# Altium PCB uln2003_PCB.PcbDoc
Units mm, origin at the board's own origin, x right, y up, seen from the top; angles counter-clockwise.
Board outline 35.03 x 23.24 mm, 2 copper layers (Top Layer, Bottom Layer); 20 components, 24 nets, 72 pads, 21 vias.
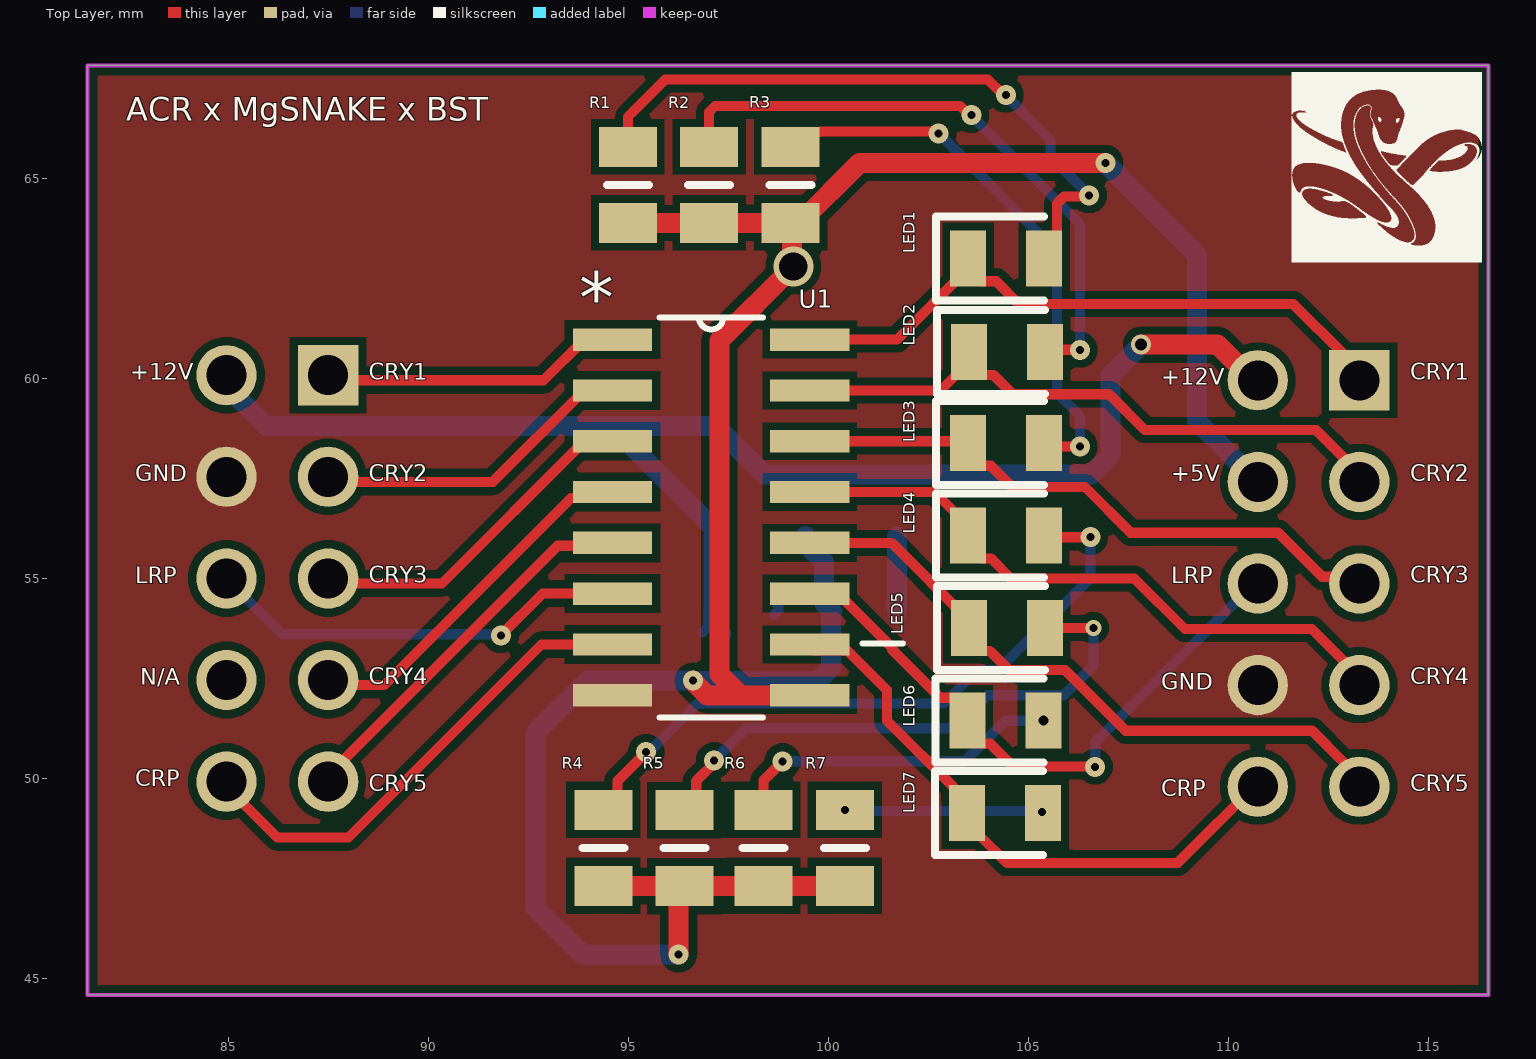
[diagram p0: Top Layer view]
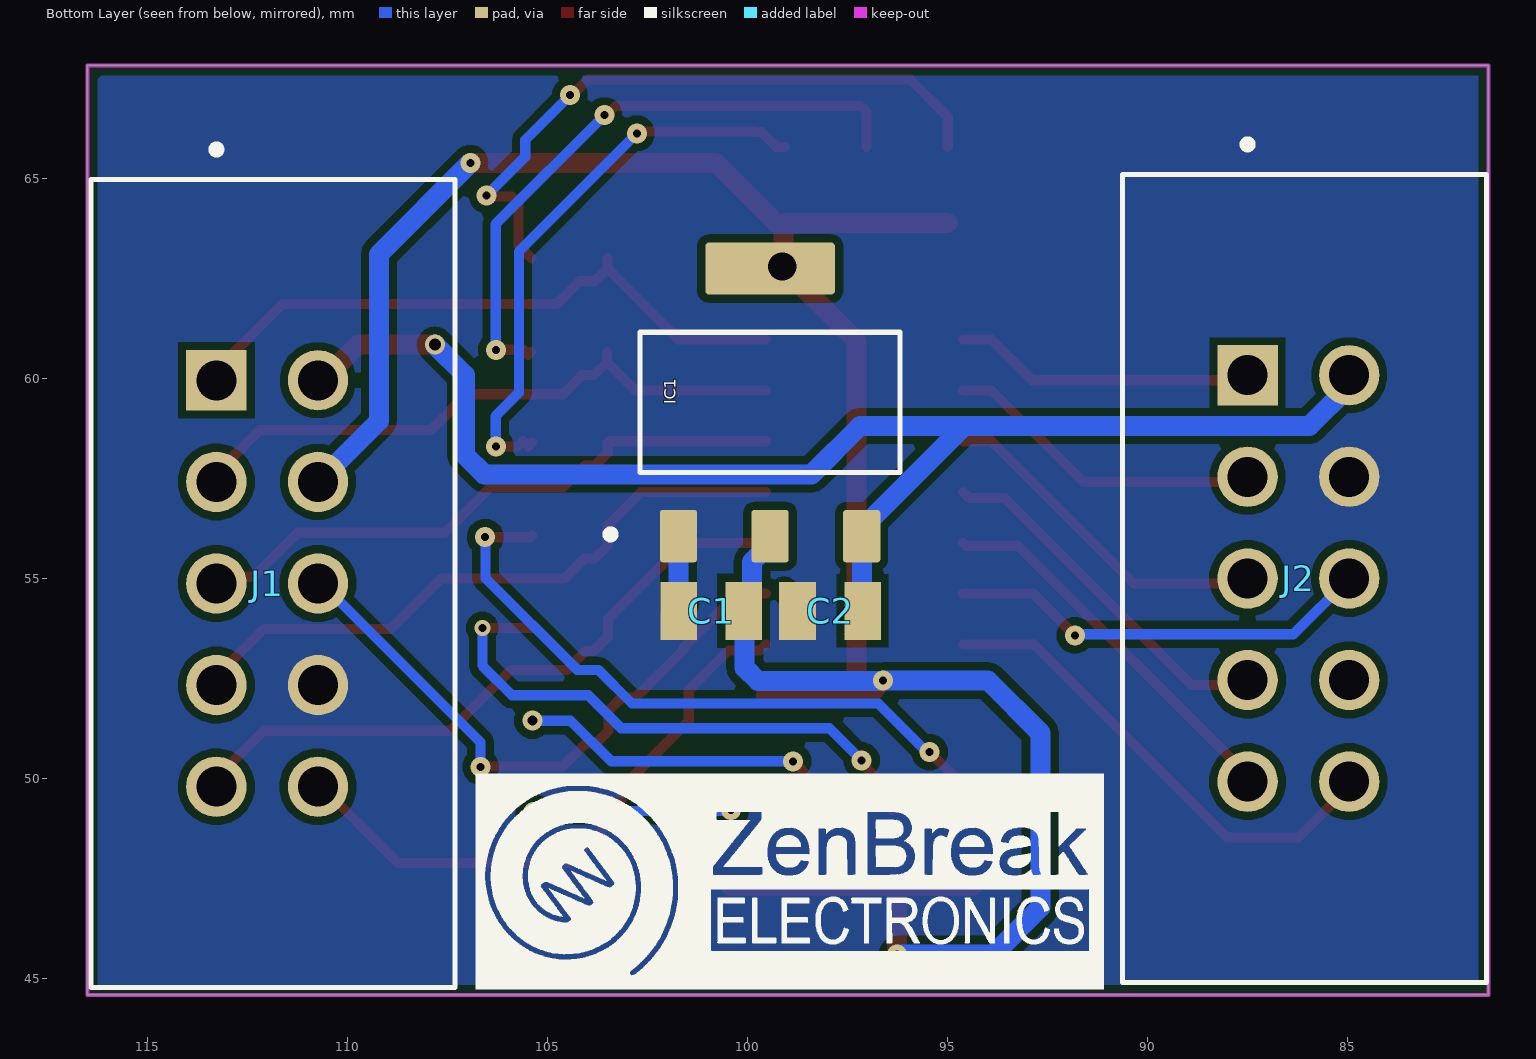
[diagram p1: Bottom Layer view, seen from below]
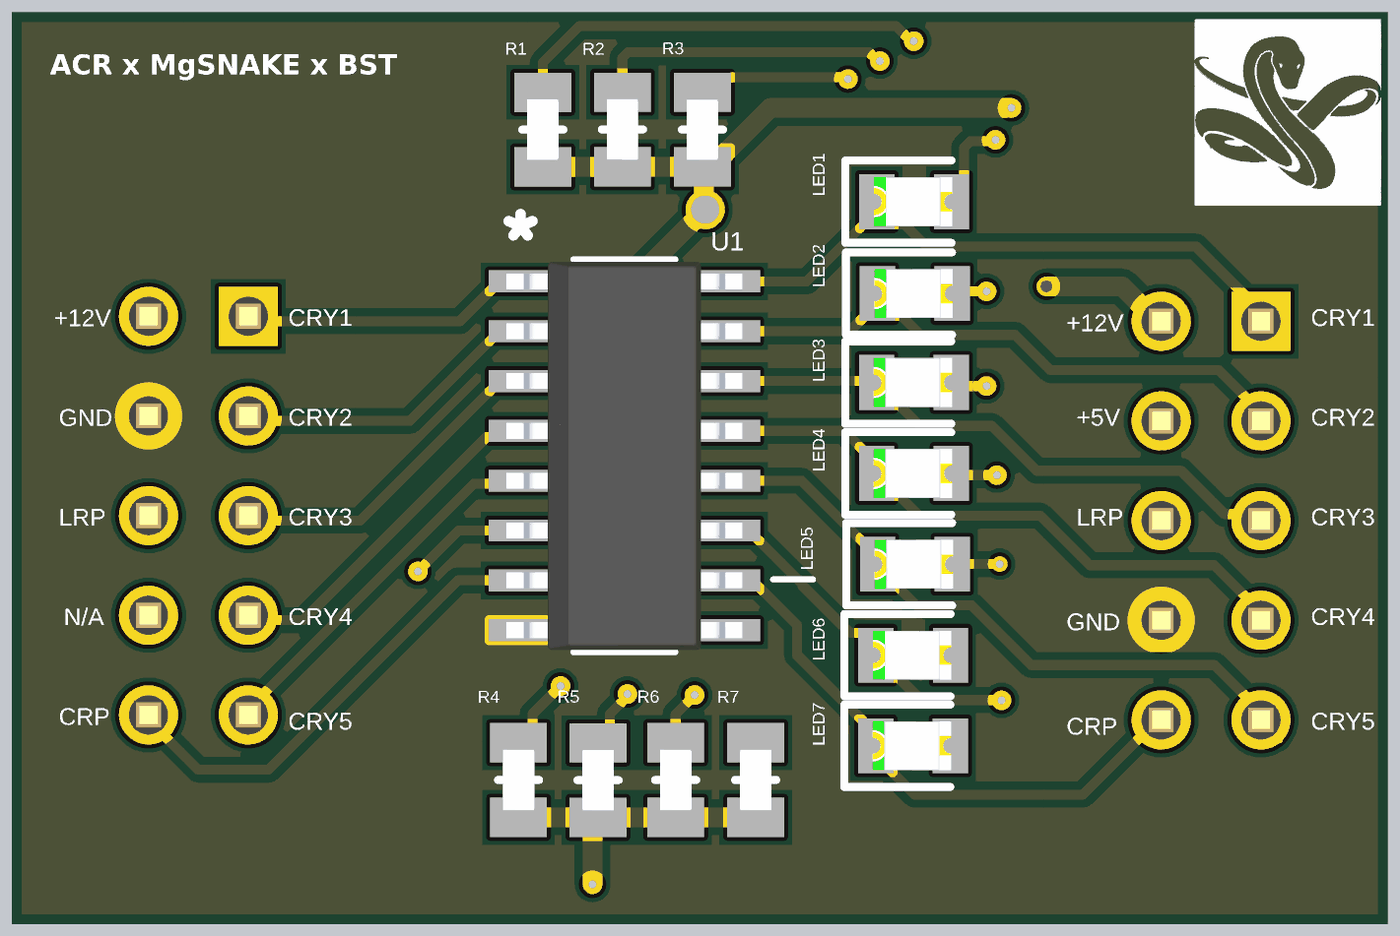
[diagram p2: 3D render of the assembled board from above, using the file's embedded part models]
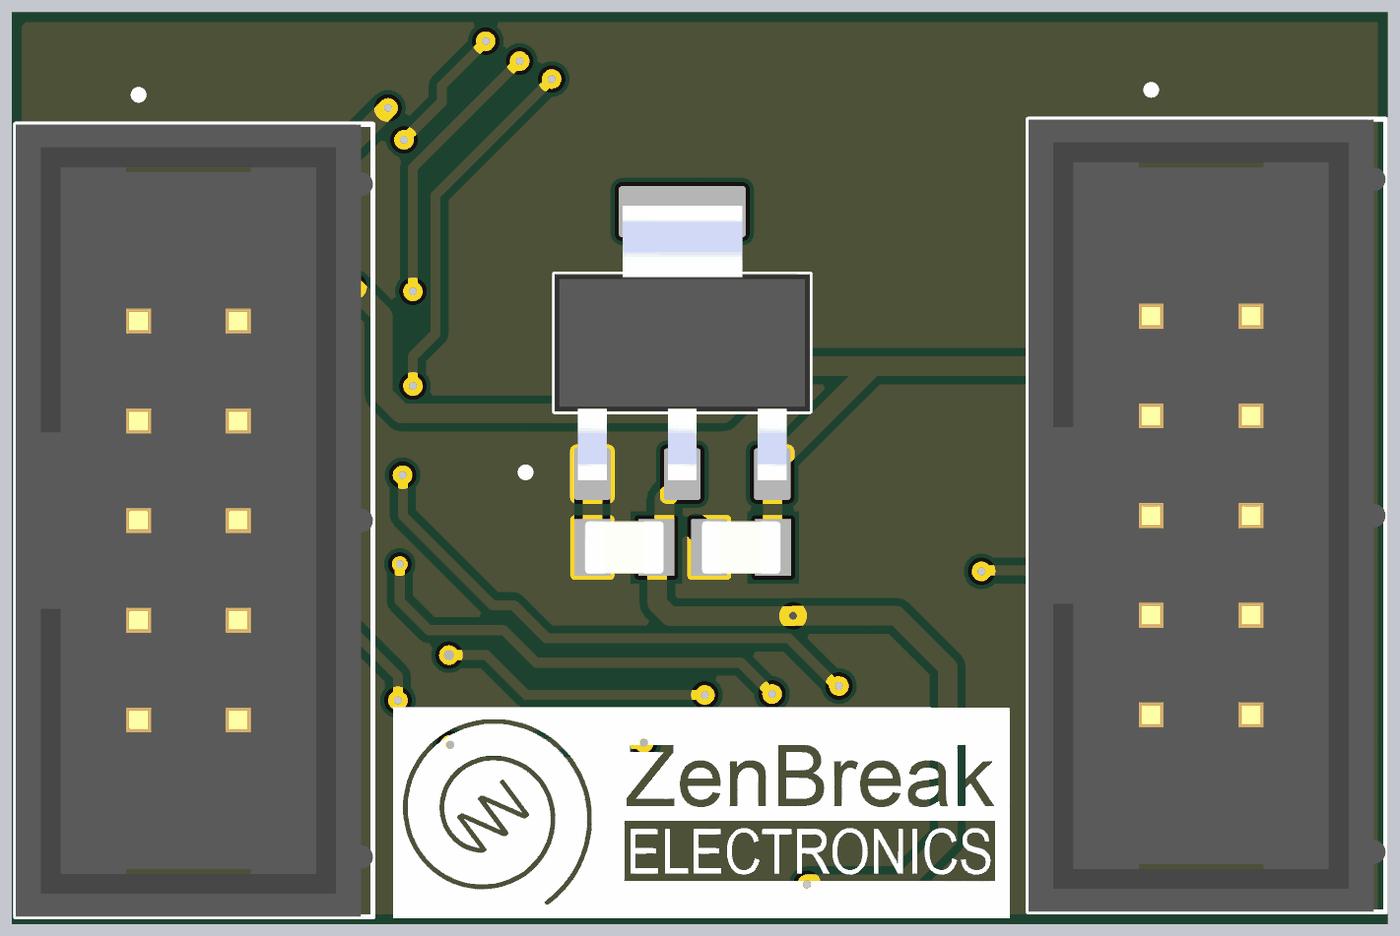
[diagram p3: 3D render of the assembled board from below, using the file's embedded part models]

## Layer stack, top to bottom
Top Solder: solder mask 0.0102, Solder Resist, Dk 3.5
Top Layer: signal copper 0.0356
Dielectric 1: dielectric 0.32, FR-4, Dk 4.8
Bottom Layer: signal copper 0.0356
Bottom Solder: solder mask 0.0102, Solder Resist, Dk 3.5

## Board outline
116.51,67.818 81.483,67.818 81.483,44.577 116.51,44.577

## Design rules (kind name [scope] priority, off if disabled: settings)
Clearance [All] p1: gap=0.2 ignorepadtopadclearanceinfootprint=TRUE except(0.1: Arc-Arc Arc-Track Track-Track; 0.127: Arc-SMDPad Track-SMDPad SMDPad-SMDPad SMDPad-Via)
HoleToHoleClearance [All] p1: gap=0.2 allowstackedmicrovias=TRUE
MinimumSolderMaskSliver [All] p1: minsoldermaskwidth=0.2
PolygonConnect [All] p1: connectstyle=Direct reliefconductorwidth=0.254 reliefentries=4 polygonreliefangle="90 Angle" airgapwidth=0.254
RoomDefinition uln2003_Shematics [InComponentClass('uln2003_Shematics')] p1: confinementstyle=ConfineIn formatcopy=TRUE lockcomponents=FALSE outline 0,0 50.8,0 50.8,25.4 0,25.4
RoutingVias [All] p1: holewidth=0.711 width=1.27 viastyle="Through Hole" minholewidth=0.01 minwidth=0.01 maxholewidth=1 maxwidth=1
SilkToSilkClearance [All] p1: silktosilkclearance=0.1
SilkToSolderMaskClearance [IsPad] p1: minsilkscreentomaskgap=0.01 clearancetoexposedcopper=TRUE
SolderMaskExpansion [All] p1: expansion=0.102 istentingtop=FALSE
Width [All] p1: maxlimit=1 minlimit=0.2 preferedwidth=0.254 minimp=50.000000 maximp=50.000000 favimp=50.000000
26 further rules are at their usual default settings.

## Components (designator, comment, footprint, x,y, rotation, side; value= is the part's Value field where it differs from the comment)
C1 "22uF" CAPC2013X140N 100.914,54.178 r0 bottom
C2 "22uF" CAPC2013X140N 97.942,54.178 r0 bottom
IC1 "AMS1117-5.0" SOT229P700X180-4N 99.441,59.393 r180 bottom
J1 "SBH11-PBPC-D05-ST-BK" SULLINS_SBH11-PBPC-D05-ST-BK 112.014,54.864 r270 bottom locked
J2 "SBH11-PBPC-D05-ST-BK" SULLINS_SBH11-PBPC-D05-ST-BK 86.233,54.991 r270 bottom locked
LED1 "150080BS75000" LEDC2012X80N 104.455,62.992 r0 top
LED2 "150080BS75000" LEDC2012X80N 104.469,60.648 r0 top
LED3 "150080BS75000" LEDC2012X80N 104.448,58.382 r0 top
LED4 "150080BS75000" LEDC2012X80N 104.449,56.065 r0 top
LED5 "150080BS75000" LEDC2012X80N 104.473,53.752 r0 top
LED6 "150080BS75000" LEDC2012X80N 104.432,51.434 r0 top
LED7 "150080BS75000" LEDC2012X80N 104.426,49.125 r0 top locked
R1 "220" RESC2012X65N 95,64.827 r270 top
R2 "220" RESC2012X65N 97.028,64.831 r270 top
R3 "220" RESC2012X65N 99.065,64.829 r270 top
R4 "220" RESC2012X65N 94.383,48.253 r270 top
R5 "220" RESC2012X65N 96.408,48.248 r270 top
R6 "220" RESC2012X65N 98.383,48.253 r270 top
R7 "220" RESC2012X65N 100.42,48.253 r270 top
U1 "ULN2003" SOIC127P600X175-16N 97.079,56.515 r0 top locked

## Footprints (in the part's own frame and the unit in brackets; to place one, negate y for a bottom-side part, rotate by r counter-clockwise, add the part's x,y. Pads: shape width x height; smd on the part's side, far side on the other; paste and mask are expansions set on the pad)
CAPC2013X140N [mil]
  rect 36x57 smd: 1(-32,0) 2(32,0)
  body extent -40,-27 40,27, height 49
LEDC2012X80N [mm]
  rect 0.9x1.4 smd: 1(-0.95,0) 2(0.95,0)
  silkscreen extent -1.75,-1.05 0.95,1.05, body extent -1.03,-0.63 0.97,0.63, height 0.7
RESC2012X65N [mm]
  rect 1x1.45 smd: 1(-0.95,0) 2(0.95,0)
  silkscreen extent 0,-0.53 0,0.53, body extent -0.77,-0.4 0.77,0.4, height 0.46
SOIC127P600X175-16N [mil]
  rect 78x22 smd: 1(-97,175) 2(-97,125) 3(-97,75) 4(-97,25) 5(-97,-25) 6(-97,-75) 7(-97,-125) 8(-97,-175) 9(97,-175) 10(97,-125) 11(97,-75) 12(97,-25) 13(97,25) 14(97,75) 15(97,125) 16(97,175)
  silkscreen extent -51,-197 189,197, body extent -118,-195 118,195, height 69
SOT229P700X180-4N [mm]
  rrect15% 0.93x1.31 smd: 1(-2.29,-3.345) 2(0,-3.345) 3(2.29,-3.345)
  rrect15% 3.24x1.31 smd: 4(0,3.345)
  silkscreen extent -4.09,-3.4 3.25,1.75, body extent -3.25,-3.5 3.25,3.5, height 1.8
SULLINS_SBH11-PBPC-D05-ST-BK [mm]
  rect 1.508x1.508 / inner round 1.508 / far side rect 1.508x1.508 hole 1: 1(-5.08,-1.27)
  round 1.508 hole 1: 2(-5.08,1.27) 3(-2.54,-1.27) 4(-2.54,1.27) 5(0,-1.27) 6(0,1.27) 7(2.54,-1.27) 8(2.54,1.27) 9(5.08,-1.27) 10(5.08,1.27)
  silkscreen extent -10.95,-4.4 10.1,4.7, body extent -10.1,-4.39 10.1,4.7, height 9.09

## Part data
C1 C2: library part 08053C474JAT2A, "Capacitor", Manufacturer_Name="Kyocera AVX", Mouser Part Number=581-08053C474JAT2A, Manufacturer_Part_Number=08053C474JAT2A, Mouser Price/Stock=https://www.mouser.co.uk/ProductDetail/KYOCERA-AVX/08053C474JAT2A?qs=bb%252B1MDm7h6L8wnHciIrwGg%3D%3D
IC1: "Integrated Circuit", Manufacturer_Name=Shikues, Datasheet Link=https://datasheet.lcsc.com/szlcsc/SK-AMS1117-5-0_C165483.pdf, Height=1.8mm, Manufacturer_Part_Number=AMS1117-5.0
J1 J2: "10 Position Total Dual Row 2.54 mm Pitch Straight Male Shrouded Box Header", Package=None, Check_prices=https://www.snapeda.com/parts/SBH11-PBPC-D05-ST-BK/Sullins+Connector+Solutions/view-part/?ref=eda, MF="Sullins Connector", MP=SBH11-PBPC-D05-ST-BK, SnapEDA_Link=https://www.snapeda.com/parts/SBH11-PBPC-D05-ST-BK/Sullins+Connector+Solutions/view-part/?ref=snap
LED1 LED2 LED3 LED4 LED5 LED6 LED7: "LED", Manufacturer_Name="Wurth Elektronik", Mouser Part Number=710-150080BS75000, Datasheet Link=https://katalog.we-online.com/led/datasheet/150080BS75000.pdf, Height=0.8mm, Manufacturer_Part_Number=150080BS75000, Mouser Price/Stock=https://www.mouser.co.uk/ProductDetail/Wurth-Elektronik/150080BS75000?qs=2kOmHSv6VfT2tBo3UPVqAQ%3D%3D
R1 R2 R3 R4 R5 R6 R7: library part CPF0805B102RE1, "Resistor", Manufacturer_Name="TE Connectivity", Datasheet Link=http://docs-europe.electrocomponents.com/webdocs/13d1/0900766b813d116f.pdf, Height=0.65mm, Manufacturer_Part_Number=CPF0805B102RE1
U1: "Bipolar (BJT) Transistor Array 7 NPN Darlington 50V 500mA - - Surface Mount 16-SOIC", Package="SOIC-16 National Semiconductor", Availability="Not in stock", Check_prices=https://www.snapeda.com/parts/ULN2003/Texas+Instruments/view-part/?ref=eda, MF="Texas Instruments", MP=ULN2003, Price=None, SnapEDA_Link=https://www.snapeda.com/parts/ULN2003/Texas+Instruments/view-part/?ref=snap

## Via types
v1: diameter 0.5, hole 0.2, Top Layer to Bottom Layer, 17 vias
v2: diameter 0.5, hole 0.25, Top Layer to Bottom Layer, 1 vias
v3: diameter 0.4, hole 0.2, Top Layer to Bottom Layer, 1 vias
v4: diameter 1, hole 0.711, Top Layer to Bottom Layer, 1 vias
v5: diameter 0.5, hole 0.3, Top Layer to Bottom Layer, 1 vias

## Nets (pads, with @x,y where several pads share a name; then routed paths per layer and width w, separated by ;. In a path a pad name is that pad's centre, name@x,y a point inside that pad or via, vN(x,y) a via of type N, cw(c..) or ccw(c..) an arc to the next point about the centre after c; other vN are vias at no path point)
+5V: C1.1 IC1.2 IC1.4 J1.4 R1.2 R2.2 R3.2 R4.2 R5.2 R6.2 R7.2 U1.9 | length 66
  Top Layer w0.254: R5.2@96.266,46.932 96.52,47.186 R5.2 R5.2@96.403,47.303 ; R2.2@97.024,63.877 R2.2 ; R6.2@98.378,47.298 R6.2 ; R3.2@99.063,63.881 R3.2 R3.2@99.29,63.879
  Top Layer w0.5: R4.2 R5.2@96.403,47.303 ; R1.2 R2.2@97.024,63.877 ; v1(96.266,45.593) R5.2@96.266,46.932 ; R5.2 R6.2@98.378,47.298 ; v1(96.621,52.438) 96.621,52.427 96.977,52.07 97.812,52.07 ; R2.2 R3.2@99.063,63.881 ; R6.2 R7.2 ; R3.2 99.101,63.843 99.101,62.824 v4(99.136,62.789) 97.282,60.935 97.282,52.6 97.812,52.07 ; R3.2@99.29,63.879 100.791,65.38 v1(106.934,65.38) ; U1.9 97.812,52.07
  Bottom Layer w0.5: v1(96.266,45.593) 93.853,45.593 92.685,46.761 92.685,51.13 93.992,52.438 v1(96.621,52.438) ; v1@96.622,52.426 99.746,52.426 100.076,52.756 100.076,54.153 C1.1 99.894,54.385 99.894,55.405 99.441,55.858 IC1.2 ; v1(106.934,65.38) 109.22,63.094 109.22,58.928 J1.4
+12: C2.1 IC1.3 J1.2 J2.2 | length 36.8
  Top Layer w0.254: J2.2@84.963,59.944 J2.2 ; J1.2@110.631,59.944 J1.2
  Top Layer w0.5: v5(107.823,60.833) 109.742,60.833 J1.2@110.631,59.944
  Bottom Layer w0.254: C2.1@96.858,53.64 C2.1@97.13,53.911
  Bottom Layer w0.3: C2.1@97.13,53.911 C2.1@97.437,53.604
  Bottom Layer w0.5: J2.2 84.963,59.798 85.96,58.801 94.588,58.801 ; C2.1@97.13,53.911 C2.1 97.14,54.189 97.14,56.037 IC1.3 97.151,56.238 94.588,58.801 ; v5(107.823,60.833) 107.068,60.078 107.068,58.072 106.589,57.593 98.403,57.593 97.195,58.801 94.588,58.801
GND: C1.2 C2.2 IC1.1 J1.8 J2.4 U1.8 | length 2.9
  Bottom Layer w0.254: C2.2@98.657,54.08 C2.2 98.755,54.381 C2.2@99.085,54.711 ; C1.2@101.549,54.356 C1.2 ; IC1.1@101.727,56.044 IC1.1
  Bottom Layer w0.5: C1.2 101.729,54.18 101.729,56.042 IC1.1@101.727,56.044
IN1: J2.1 U1.1 | length 7.5
  Top Layer w0.254: J2.1@87.503,59.944 92.888,59.944 93.904,60.96 U1.1
IN2: J2.3 U1.2 | length 8.1
  Top Layer w0.254: J2.3@87.503,57.404 91.618,57.404 93.904,59.69 U1.2
IN3: J2.5 U1.3 | length 8.6
  Top Layer w0.254: J2.5@87.503,54.864 90.348,54.864 93.904,58.42 U1.3
IN4: J2.7 U1.4 | length 9.1
  Top Layer w0.254: J2.7@87.503,52.324 88.9,52.324 93.574,56.998 94.463,56.998 U1.4
IN5: J2.9 U1.5 | length 9.7
  Top Layer w0.254: J2.9 87.503,50.067 93.243,55.807 94.542,55.807 U1.5
IN6: J2.6 U1.6 | length 10.7
  Top Layer w0.254: v1(91.821,53.569) 92.862,54.61 U1.6
  Bottom Layer w0.254: J2.6 86.36,53.594 91.796,53.594 v1(91.821,53.569)
IN7: J2.10 U1.7 | length 12.2
  Top Layer w0.254: J2.10@84.963,49.784 86.233,48.514 88.011,48.514 92.837,53.34 U1.7
NetJ1_1: J1.1 LED1.1 U1.16 | length 15.2
  Top Layer w0.254: U1.16 101.723,60.96 LED1.1@103.505,62.742 ; LED1.1 LED1.1@103.505,62.742 ; J1.1@112.903,60.579 111.633,61.849 104.775,61.849 104.205,62.419 103.828,62.419 LED1.1@103.505,62.742
NetJ1_3: J1.3 LED2.1 U1.15 | length 15.8
  Top Layer w0.254: U1.15 102.811,59.69 103.519,60.398 103.519,60.536 LED2.1 103.519,60.403 103.842,60.08 104.131,60.08 104.615,59.596 107.028,59.596 107.927,58.697 112.206,58.697 J1.3@112.884,58.02 ; J1.3@113.265,57.385 J1.3@113.726,56.924
NetJ1_5: J1.5 LED3.1 U1.14 | length 15.4
  Top Layer w0.254: U1.14 103.461,58.42 LED3.1 103.498,58.132 103.821,57.809 104.071,57.809 104.604,57.277 106.426,57.277 107.569,56.134 111.252,56.134 112.354,55.032 112.89,55.032 J1.5@112.903,55.019 ; J1.5@113.284,54.384 J1.5@113.726,54.384
NetJ1_6: J1.6 LED6.1 U1.11 | length 15.7
  Top Layer w0.254: U1.11 100.254,54.61 101.607,53.257 101.607,53.208 102.808,52.007 103.159,52.007 103.482,51.684 103.482,51.184 103.805,50.861 104.055,50.861 104.623,50.292 106.67,50.292 v1(106.68,50.282)
  Bottom Layer w0.254: v1(106.68,50.282) 106.68,50.894 J1.6@110.805,55.019
NetJ1_7: J1.7 LED4.1 U1.13 | length 16
  Top Layer w0.254: U1.13 102.664,57.15 103.499,56.315 103.499,55.815 103.822,55.492 104.073,55.492 104.575,54.991 107.66,54.991 108.923,53.728 112.096,53.728 J1.7@112.884,52.94 ; J1.7@113.265,52.305 J1.7@113.726,51.844
NetJ1_9: J1.9 LED5.1 U1.12 | length 16.5
  Top Layer w0.254: U1.12 101.591,55.88 103.496,53.974 103.496,53.529 103.846,53.179 104.042,53.179 104.516,52.705 105.918,52.705 107.442,51.181 112.102,51.181 J1.9@112.884,50.4 ; J1.9@113.265,49.765 J1.9@113.726,49.304
NetJ1_10: J1.10 LED7.1 U1.10 | length 15.1
  Top Layer w0.254: U1.10 99.695,53.188 100.482,53.188 101.473,52.197 101.473,51.435 103.153,49.755 103.153,49.448 LED7.1 103.476,48.875 103.799,48.552 104.472,47.879 108.745,47.879 J1.10@110.805,49.939
NetLED1_2: LED1.2 R1.1 | length 16.5
  Top Layer w0.254: R1.1 95,66.53 95.932,67.462 103.997,67.462 104.378,67.081 v1(104.445,67.081) ; LED1.2 105.728,63.315 105.728,64.367 105.897,64.536 106.497,64.536 v1(106.528,64.567)
  Bottom Layer w0.254: v1(104.445,67.081) 104.445,67.071 105.562,65.953 105.562,65.532 v1(106.528,64.567)
NetLED2_2: LED2.2 R2.1 | length 15.5
  Top Layer w0.254: R2.1 97.028,66.653 97.177,66.802 103.304,66.802 103.532,66.573 v1(103.581,66.573) ; LED2.2 105.489,60.579 105.616,60.706 v1(106.299,60.706)
  Bottom Layer w0.254: v1(103.581,66.573) 106.299,63.856 v1(106.299,60.706)
NetLED3_2: LED3.2 R3.1 | length 14.2
  Top Layer w0.254: R3.1 99.29,65.779 99.663,66.152 99.8,66.152 99.812,66.163 102.721,66.163 v1(102.768,66.116) ; LED3.2 105.488,58.293 105.615,58.42 105.742,58.293 v1(106.299,58.293)
  Bottom Layer w0.254: v1(102.768,66.116) 105.722,63.163 105.722,59.632 106.299,59.055 v1(106.299,58.293)
NetLED4_2: LED4.2 R4.1 | length 17
  Top Layer w0.254: R4.1 94.741,49.561 94.741,49.935 v1(95.453,50.648) ; LED4.2 105.442,56.022 v1(106.562,56.022)
  Bottom Layer w0.254: v1(95.453,50.648) 95.52,50.648 96.735,51.863 102.892,51.863 103.734,52.705 104.264,52.705 106.555,54.996 106.555,56.014 v1(106.562,56.022)
NetLED5_2: LED5.2 R5.1 | length 15.4
  Top Layer w0.254: R5.1 96.708,49.498 96.708,49.93 97.155,50.378 v1(97.155,50.444) ; LED5.2 105.425,53.755 v3(106.634,53.755) LED5.2@105.423,53.755
  Bottom Layer w0.254: v1(97.155,50.444) 97.955,51.244 103.162,51.244 103.988,52.07 105.893,52.07 106.634,52.811 v3(106.634,53.755)
NetLED6_2: LED6.2 R6.1 | length 8.4
  Top Layer w0.254: R6.1 98.383,49.936 v1(98.866,50.419)
  Bottom Layer w0.254: v1(98.866,50.419) 103.416,50.419 104.432,51.435 ; 104.432,51.434 v2(105.382,51.434)
NetLED7_2: LED7.2 R7.1 | length 5
  Top Layer w0.254: v1(105.352,49.149) LED7.2
  Bottom Layer w0.254: v1(100.42,49.203) 100.447,49.176 105.326,49.176 v1(105.352,49.149)
pads on no net: J2.8

## Polygon pours and split planes (outlines as drawn)
GND on Top Layer "GND_L01_P000" (solid, pour order 0): 116.459,67.767 116.459,44.628 81.534,44.628 81.534,67.767
GND on Bottom Layer "GND_L02_P001" (solid, pour order 1): 116.459,67.767 116.459,44.628 81.534,44.628 81.534,67.767

## Keep-outs
Keep-Out Layer:
  the board outline again, w0.1

## Silkscreen, mask and mechanical layers (free items; w line width, h text height)
Top Overlay:
  drawing of 3 lines, arcs and shapes, not listed
  text "ACR x MgSNAKE x BST" at 82.455,66.237 h1
  text "+12V" at 82.55,59.817 h0.7
  text "CRY1" at 88.519,59.825 h0.7
  text "CRY1" at 114.554,59.825 h0.7
  text "+12V" at 108.331,59.69 h0.7
  text "GND" at 82.677,57.277 h0.7
  text "CRY2" at 88.519,57.285 h0.7
  text "+5V" at 108.585,57.285 h0.7
  text "CRY2" at 114.554,57.285 h0.7
  text "LRP" at 82.677,54.737 h0.7
  text "CRY3" at 88.519,54.745 h0.7
  text "LRP" at 108.585,54.737 h0.7
  text "CRY3" at 114.554,54.745 h0.7
  text "N/A" at 82.804,52.197 h0.7
  text "CRY4" at 88.519,52.205 h0.7
  text "CRY4" at 114.554,52.205 h0.7
  text "GND" at 108.331,52.07 h0.7
  text "CRP" at 82.677,49.657 h0.7
  text "CRY5" at 88.519,49.538 h0.7
  text "CRY5" at 114.554,49.538 h0.7
  text "CRP" at 108.331,49.411 h0.7
Bottom Overlay:
  drawing of 17 lines, arcs and shapes, not listed

## Text inside footprints (layer, text, board x,y; h text height)
U1: Top Overlay "*" at 93.777,61.392 h1.27; Mechanical 13 "*" at 93.777,61.392 h1.27